# EAGLE board Flex_PCB_IMS_Coupler_v1 (EAGLE 9.3.0)
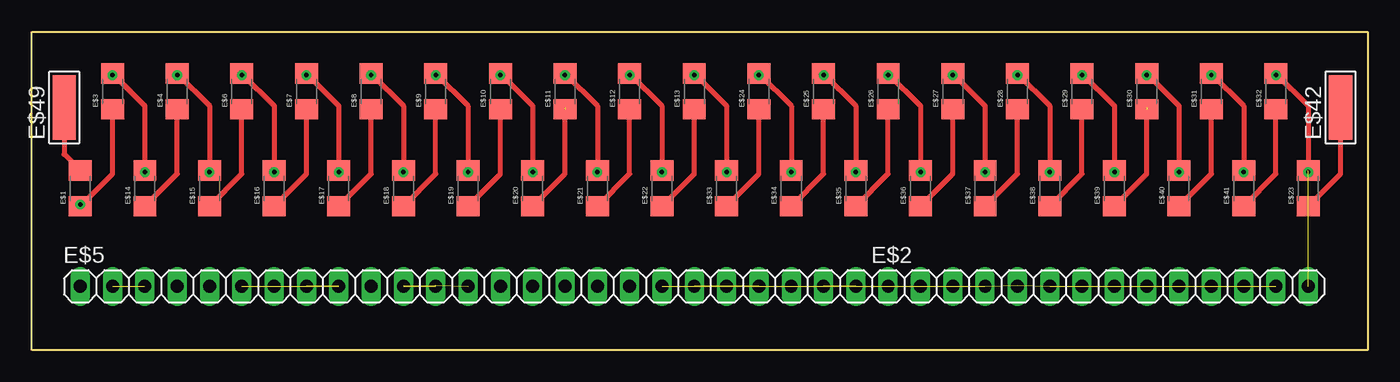
[diagram p0: board, top side]
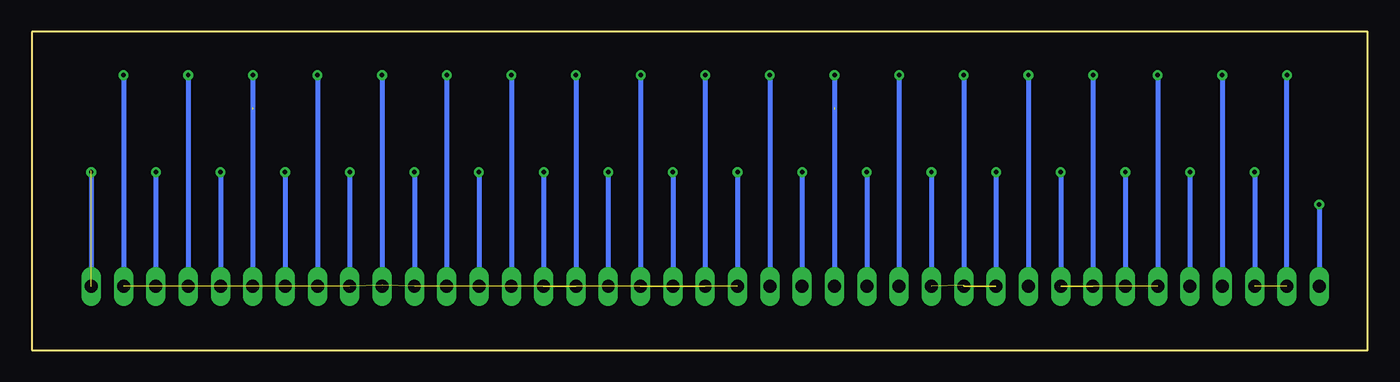
[diagram p1: board, bottom side, seen from below]

Size 105 x 25 mm. Coordinates in mm from the lower left corner, seen from the top.
Outline: 0,0 0,25 105,25 105,0 0,0
Copper layers (1*16): Top 0.035mm / dielectric 1.5mm / Bottom 0.035mm
Design rules "default": minimum track width 6mil, minimum drill 0.35mm, track to track 6mil, track to pad 6mil, pad to pad 6mil, via to via 6mil, smd to smd 6mil, copper to edge 40mil, drill to drill 6mil, minimum pad ring 10mil, minimum via ring 8mil, stop-mask expansion 4mil, vias tented up to drill 0mil, thermal gap 10mil

## Footprints (pad centres in the part's own frame; a part is rotated, then mirrored left to right if it is on the bottom)
1206 = smd 1.6 x 1.8: 1 -1.4,0; 2 1.4,0
1X14 = drill 1.016 long: 1 -16.51,0; 2 -13.97,0; 3 -11.43,0; 4 -8.89,0; 5 -6.35,0; 6 -3.81,0; 7 -1.27,0; 8 1.27,0; 9 3.81,0; 10 6.35,0; 11 8.89,0; 12 11.43,0; 13 13.97,0; 14 16.51,0
1X25 = drill 1.016 long: 1 -29.21,0; 2 -26.67,0; 3 -24.13,0; 4 -21.59,0; 5 -19.05,0; 6 -16.51,0; 7 -13.97,0; 8 -11.43,0; 9 -8.89,0; 10 -6.35,0; 11 -3.81,0; 12 -1.27,0; 13 1.27,0; 14 3.81,0; 15 6.35,0; 16 8.89,0; 17 11.43,0; 18 13.97,0; 19 16.51,0; 20 19.05,0; 21 21.59,0; 22 24.13,0; 23 26.67,0; 24 29.21,0; 25 31.75,0
5-1,8 = smd 1.829 x 5.08: 1 0,0

## Placement (x,y rotation side)
E$1  [1206]  3.81,12.7 90 top
E$2  [1X14]  83.82,5 0 top
E$3  [1206]  6.35,20.32 90 top
E$4  [1206]  11.43,20.32 90 top
E$5  [1X25]  33.02,5 0 top
E$6  [1206]  16.51,20.32 90 top
E$7  [1206]  21.59,20.32 90 top
E$8  [1206]  26.67,20.32 90 top
E$9  [1206]  31.75,20.32 90 top
E$10  [1206]  36.83,20.32 90 top
E$11  [1206]  41.91,20.32 90 top
E$12  [1206]  46.99,20.32 90 top
E$13  [1206]  52.07,20.32 90 top
E$14  [1206]  8.89,12.7 90 top
E$15  [1206]  13.97,12.7 90 top
E$16  [1206]  19.05,12.7 90 top
E$17  [1206]  24.13,12.7 90 top
E$18  [1206]  29.21,12.7 90 top
E$19  [1206]  34.29,12.7 90 top
E$20  [1206]  39.37,12.7 90 top
E$21  [1206]  44.45,12.7 90 top
E$22  [1206]  49.53,12.7 90 top
E$23  [1206]  100.33,12.7 90 top
E$24  [1206]  57.15,20.32 90 top
E$25  [1206]  62.23,20.32 90 top
E$26  [1206]  67.31,20.32 90 top
E$27  [1206]  72.39,20.32 90 top
E$28  [1206]  77.47,20.32 90 top
E$29  [1206]  82.55,20.32 90 top
E$30  [1206]  87.63,20.32 90 top
E$31  [1206]  92.71,20.32 90 top
E$32  [1206]  97.79,20.32 90 top
E$33  [1206]  54.61,12.7 90 top
E$34  [1206]  59.69,12.7 90 top
E$35  [1206]  64.77,12.7 90 top
E$36  [1206]  69.85,12.7 90 top
E$37  [1206]  74.93,12.7 90 top
E$38  [1206]  80.01,12.7 90 top
E$39  [1206]  85.09,12.7 90 top
E$40  [1206]  90.17,12.7 90 top
E$41  [1206]  95.25,12.7 90 top
E$42  [5-1,8]  102.87,19.05 0 top
E$49  [5-1,8]  2.54,19.05 0 top

## Library data of the parts
E$1 E$3 E$4 E$6-E$41 = SparkFun-Passives
E$2 E$5 = pinhead
E$42 E$49 = wirepad

## Nets
S$1: E$1.1 E$3.1
S$2: E$5.1 E$5.2 E$5.3 E$5.4 E$5.5 E$5.6 E$5.7 E$5.8 E$5.9 E$5.10 E$5.11 E$5.12 E$5.13 E$5.14 E$5.15 E$5.16 E$5.17 E$5.18 E$5.19 E$5.20 E$5.21 E$5.22 E$5.23 E$5.24 E$5.25
S$3: E$3.2 E$14.2
S$4: E$4.2 E$15.2
S$5: E$6.2 E$16.2
S$6: E$7.2 E$17.2
S$7: E$8.2 E$18.2
S$8: E$9.2 E$19.2
S$9: E$10.2 E$20.2
S$10: E$11.2 E$21.2
S$12: E$12.2 E$22.2
S$13: E$4.1 E$14.1
S$14: E$6.1 E$15.1
S$15: E$7.1 E$16.1
S$16: E$8.1 E$17.1
S$17: E$9.1 E$18.1
S$18: E$10.1 E$19.1
S$19: E$11.1 E$20.1
S$20: E$12.1 E$21.1
S$21: E$13.1 E$22.1
S$23: E$2.14 E$23.2 E$32.2
S$24: E$13.2 E$33.2
S$25: E$24.2 E$34.2
S$26: E$25.2 E$35.2
S$27: E$26.2 E$36.2
S$28: E$27.2 E$37.2
S$29: E$28.2 E$38.2
S$30: E$29.2 E$39.2
S$31: E$30.2 E$40.2
S$32: E$31.2 E$41.2
S$33: E$24.1 E$33.1
S$34: E$25.1 E$34.1
S$35: E$26.1 E$35.1
S$36: E$27.1 E$36.1
S$37: E$28.1 E$37.1
S$38: E$29.1 E$38.1
S$39: E$30.1 E$39.1
S$40: E$31.1 E$40.1
S$41: E$32.1 E$41.1
S$43: E$23.1 E$42.1
S$44: E$1.2 E$49.1

## Tracks (layer width: path | path; a pad name or v marks a point on that pad's centre or on a via)
S$1
  Top 0.406: E$1.1 6.35,13.84 E$3.1
S$2  (via drill 0.35)  (16 unrouted)
  Bottom 0.406: E$5.2 v6.35,21.59 | v8.89,13.97 E$5.3 | v11.43,21.59 E$5.4 | v13.97,13.97 E$5.5 | v16.51,21.59 E$5.6 | v19.05,13.97 E$5.7 | v21.59,21.59 E$5.8 | v24.13,13.97 E$5.9 | v26.67,21.59 E$5.10 | v29.21,13.97 E$5.11 | v31.75,21.59 31.75,5.08 | v34.29,13.97 E$5.13 | v36.83,21.59 E$5.14 | v39.37,13.97 E$5.15 | v41.91,21.59 E$5.16 | v44.45,13.97 E$5.17 | v46.99,21.59 E$5.18 | v49.53,13.97 E$5.19 | v52.07,21.59 E$5.20
S$3
  Top 0.406: E$3.2 8.89,19.18 E$14.2
S$4
  Top 0.406: E$4.2 13.97,19.18 E$15.2
S$5
  Top 0.406: E$6.2 19.05,19.18 E$16.2 19.05,13.97
S$6
  Top 0.406: E$7.2 24.13,19.18 E$17.2
S$7
  Top 0.406: E$8.2 29.21,19.18 E$18.2
S$8
  Top 0.406: E$9.2 34.29,19.18 E$19.2
S$9
  Top 0.406: E$10.2 39.37,19.18 E$20.2
S$10
  Top 0.406: E$11.2 44.45,19.18 E$21.2
S$11  (via drill 0.35)
  Bottom 0.406: v3.81,11.43 3.81,5.08
S$12
  Top 0.406: E$12.2 49.53,19.18 E$22.2
S$13
  Top 0.406: E$14.1 11.43,13.84 E$4.1
S$14
  Top 0.406: E$15.1 16.51,13.84 E$6.1
S$15
  Top 0.406: E$16.1 21.59,13.84 E$7.1
S$16
  Top 0.406: E$17.1 26.67,13.84 E$8.1
S$17
  Top 0.406: E$18.1 31.75,13.84 E$9.1
S$18
  Top 0.406: E$19.1 36.83,13.84 E$10.1
S$19  (1 unrouted)
  Top 0.406: E$20.1 41.91,13.84 41.91,19.05
S$20
  Top 0.406: E$21.1 46.99,13.84 E$12.1
S$21
  Top 0.406: E$22.1 52.07,13.84 E$13.1
S$22  (via drill 0.35)  (17 unrouted)
  Bottom 0.406: v54.61,13.97 54.61,5 | v57.15,21.59 57.15,5 | v59.69,13.97 59.69,5 | v62.23,21.59 62.23,5 | v64.77,13.97 64.77,5 | v67.31,21.59 67.31,5 | v69.85,13.97 69.85,5 | v72.39,21.59 72.39,5 | v74.93,13.97 74.93,5 | v77.47,21.59 77.47,5.08 | v80.01,13.97 80.01,5 | v82.55,21.59 82.55,5 | v85.09,13.97 85.09,5 | v87.63,21.59 87.63,5 | v90.17,13.97 90.17,5 | v92.71,21.59 92.71,5 | v95.25,13.97 95.25,5 | v97.79,21.59 97.79,5
S$23  (1 unrouted)
  Top 0.406: E$32.2 100.33,19.18 E$23.2
S$24
  Top 0.406: E$13.2 54.61,19.18 E$33.2
S$25
  Top 0.406: E$24.2 59.69,19.18 E$34.2
S$26
  Top 0.406: E$25.2 64.77,19.18 E$35.2 64.77,13.97
S$27
  Top 0.406: E$26.2 69.85,19.18 E$36.2
S$28
  Top 0.406: E$27.2 74.93,19.18 E$37.2
S$29
  Top 0.406: E$28.2 80.01,19.18 E$38.2
S$30
  Top 0.406: E$29.2 85.09,19.18 E$39.2
S$31
  Top 0.406: E$30.2 90.17,19.18 E$40.2
S$32
  Top 0.406: E$31.2 95.25,19.18 E$41.2
S$33
  Top 0.406: E$33.1 57.15,13.84 E$24.1
S$34
  Top 0.406: E$34.1 62.23,13.84 E$25.1
S$35
  Top 0.406: E$35.1 67.31,13.84 E$26.1
S$36
  Top 0.406: E$36.1 72.39,13.84 E$27.1
S$37
  Top 0.406: E$37.1 77.47,13.84 E$28.1
S$38
  Top 0.406: E$38.1 82.55,13.84 E$29.1
S$39  (1 unrouted)
  Top 0.406: E$39.1 87.63,13.84 87.63,19.05
S$40
  Top 0.406: E$40.1 92.71,13.84 E$31.1
S$41
  Top 0.406: E$41.1 97.79,13.84 E$32.1
S$42  (via drill 0.35)
  Bottom 0.406: v100.33,13.97 100.33,5.08
S$43
  Top 0.406: E$23.1 102.87,13.84 E$42.1
S$44
  Top 0.406: E$49.1 2.54,15.37 E$1.2

## Text on the board
tValues: HV | GND